# Altium PCB Audiodevice.PcbDoc (part 3 of 3)
Units mm, origin at the board's own origin, x right, y up, seen from the top; angles counter-clockwise.
Board outline 193.67 x 66.67 mm, 2 copper layers (Top Layer, Bottom Layer); 196 components, 164 nets, 795 pads, 323 vias.
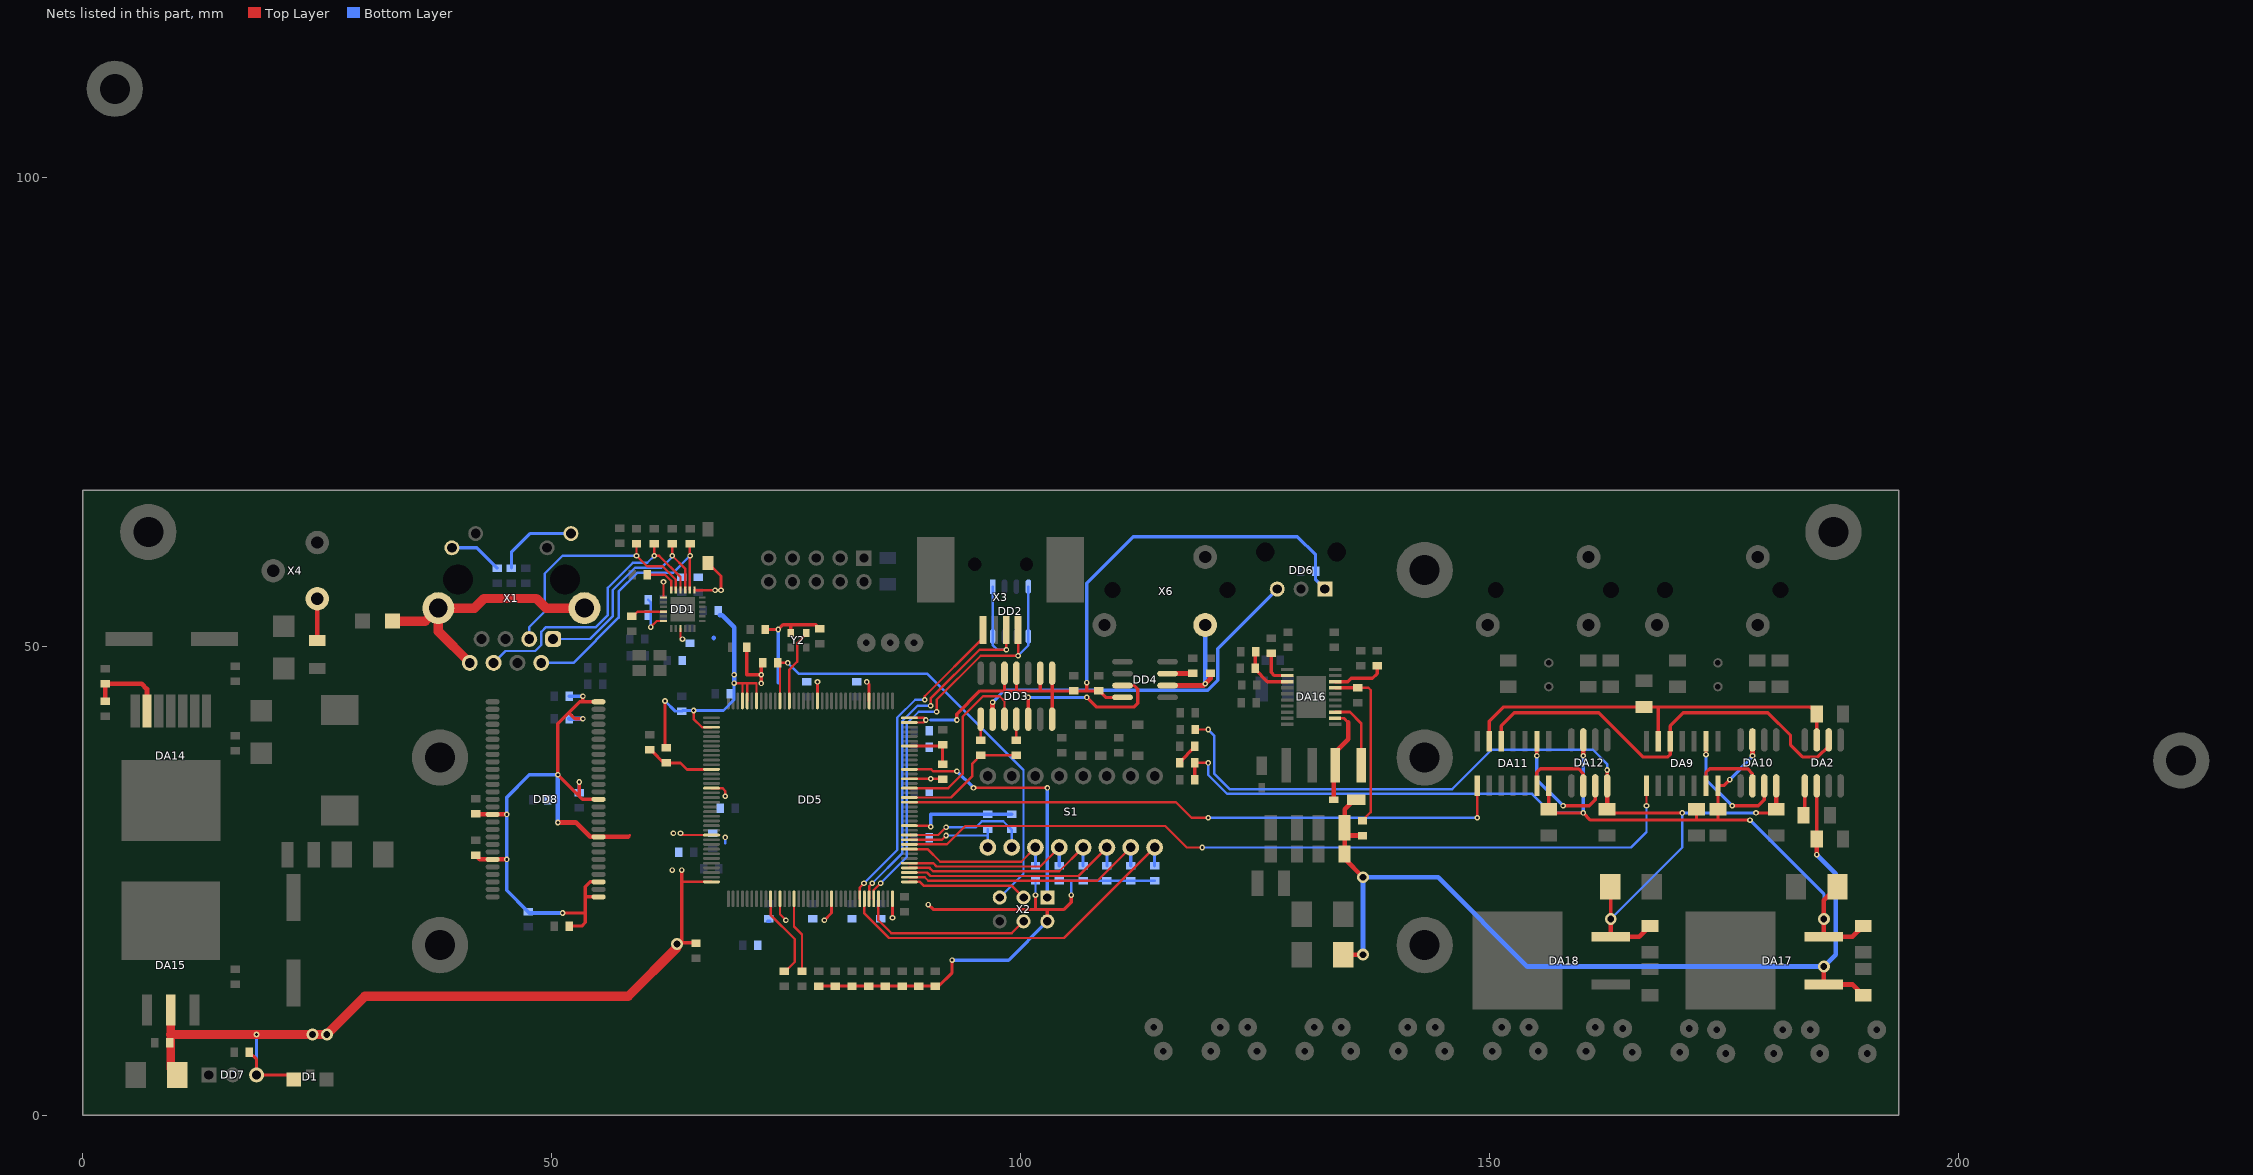
[diagram p3: the nets of this part, all layers, seen from the top]

## Via types
v1: diameter 0.6, hole 0.3, Top Layer to Bottom Layer, 276 vias
v2: diameter 1.27, hole 0.711, Top Layer to Bottom Layer, 47 vias

## Nets (pads, with @x,y where several pads share a name; then routed paths per layer and width w, separated by ;. In a path a pad name is that pad's centre, name@x,y a point inside that pad or via, vN(x,y) a via of type N, cw(c..) or ccw(c..) an arc to the next point about the centre after c; other vN are vias at no path point) (continued)
NetD11_1: D11.1 DA16.2 L3.1 | length 10.5
  Top Layer w0.3: DA16.2@133.548,42.358 134.502,42.358 134.945,41.915
  Top Layer w0.5: D11.1@133.42,33.66 133.42,37.208 L3.1@133.555,37.343 133.555,38.747 134.945,40.137 134.945,41.915
NetDA9_2: DA9.2 DA10.3 | length 13.2
  Top Layer w0.35: v1(173.101,38.481) DA9.2@173.101,39.903 ; v1(175.895,33.02) 178.689,33.02 179.324,33.655 DA10.3@179.324,35.142
  Bottom Layer w0.35: v1(173.101,38.481) 173.101,35.814 v1(175.895,33.02)
NetDA9_13: DA9.13 DA10.2 | length 8
  Top Layer w0.35: DA9.13@173.101,35.179 173.101,36.576 173.482,36.957 177.546,36.957 178.054,36.449 DA10.2@178.054,35.142
NetDA11_2: DA11.2 DA12.3 | length 13.2
  Top Layer w0.35: v1(155.067,38.354) DA11.2@155.067,39.903 ; v1(157.861,33.02) 160.655,33.02 161.29,33.655 DA12.3@161.29,35.142
  Bottom Layer w0.35: v1(155.067,38.354) 155.067,35.814 v1(157.861,33.02)
NetDA11_13: DA11.13 DA12.2 | length 8
  Top Layer w0.35: DA11.13@155.067,35.179 155.067,36.576 155.448,36.957 159.512,36.957 160.02,36.449 DA12.2@160.02,35.142
NetDA14_6: DA14.6 R45.1 R47.2 | length 8.9
  Top Layer w0.5: R45.1@2.413,44.145 R47.2@2.413,46.025 6.299,46.025 6.858,45.466 DA14.6@6.858,43.134
NetDA16_3: DA16.3 L3.2 | length 7.7
  Top Layer w0.3: DA16.3@133.558,43.008 135.122,43.008 136.335,41.795 L3.2@136.335,37.343
NetDA16_7: DA16.7 R50.1 R53.2 | length 18.2
  Top Layer w0.254: R53.2@135.961,45.598 137.104,45.598 137.358,45.344 137.358,32.339 R50.1@136.469,31.45
  Top Layer w0.35: DA16.7@133.558,45.608 R53.2@135.961,45.608
NetDA16_8: DA16.8 R55.1 | length 5.7
  Top Layer w0.35: DA16.8@133.558,46.258 134.904,46.258 135.255,46.609 137.541,46.609 138.049,47.117 R55.1@138.049,47.93
NetDA16_12: DA16.12 R54.2 | length 3.9
  Top Layer w0.35: R54.2@126.746,49.276 126.746,47.244 127.082,46.908 DA16.12@128.458,46.908
NetDA16_13: DA16.13 R49.1 R52.2 | length 5.7
  Top Layer w0.35: R49.1@125.064,49.332 125.039,49.307 R52.2@125.039,47.681 125.039,47.554 126.335,46.258 DA16.13@128.458,46.258
NetDD1_4: DD1.4 R10.2 | length 3.5
  Top Layer w0.254: R10.2@58.674,53.213 59.186,53.725 DD1.4@61.939,53.725
NetDD1_24: DD1.24 R9.2 | length 3.8
  Top Layer w0.254: R9.2@60.198,57.658 62.096,57.658 62.746,57.008 DD1.24@62.746,56.032
NetDD2_1: DD2.1 DD2.8 DD5.103 X3.2@98.501,51.765 | length 45.1
  Top Layer w0.254: DD5.103@83.856,23.101 83.856,24.42 v1(84.201,24.765) ; v1(90.424,43.688) 90.424,44.443 95.638,49.657 v1(98.501,49.657) X3.2@98.501,51.765
  Bottom Layer w0.254: v1(84.201,24.765) 87.376,27.94 87.376,42.037 89.027,43.688 v1(90.424,43.688) ; DD2.1@97.028,56.388 DD2.8@97.028,51.088 97.028,50.165 97.536,49.657 v1(98.501,49.657)
NetDD2_4: DD2.4 DD2.5 DD5.104 X3.3@99.746,51.765 | length 46.3
  Top Layer w0.254: DD5.104@84.356,23.101 84.356,24.031 v1(85.09,24.765) ; v1(91.059,43.053) 91.059,44.323 95.758,49.022 v1(99.746,49.022) X3.3@99.746,51.765
  Bottom Layer w0.254: v1(85.09,24.765) 87.884,27.559 87.884,41.783 89.154,43.053 v1(91.059,43.053) ; v1(99.746,49.022) 100.838,50.114 DD2.5@100.838,51.088 DD2.4@100.838,56.388
NetDD3_8: DD3.8 R19.2 | length 2.2
  Top Layer w0.254: R19.2@95.758,40.005 DD3.8@95.758,42.254
NetDD3_9: DD3.9 DD6.3 | length 39.1
  Top Layer w0.5: DD3.9@97.028,42 DD3.9@97.028,42.254 v1@97.028,43.815
  Bottom Layer w0.35: v1(97.028,44.069) 98.298,45.339 119.961,45.339 121.031,46.409 121.031,49.784 DD6.3@127.381,56.134
NetDD3_11: DD3.11 R16.2 | length 2.2
  Top Layer w0.254: R16.2@99.568,40.005 DD3.11@99.568,42.254
NetDD3_12: DD3.12 DD4.7 | length 17.9
  Top Layer w0.35: DD3.12@100.838,42.254 v1(100.838,44.577) ; v1(107.061,44.577) 108.077,43.561 112.141,43.561 112.522,43.942 112.522,45.466 112.141,45.847 DD4.7@110.884,45.847
  Bottom Layer w0.35: v1(100.838,44.577) v1(107.061,44.577)
NetDD4_2: DD4.2 R15.2 X6.1 | length 11.7
  Top Layer w0.5: DD4.2@115.684,45.847 119.514,45.847 v1(119.701,46.034) 120.269,46.602 R15.2@120.269,47.168
  Bottom Layer w0.5: v1(119.701,46.034) X6.1@119.701,52.297
NetDD4_3: DD4.3 R18.2 | length 2.7
  Top Layer w0.5: DD4.3@115.684,47.117 118.313,47.117 R18.2@118.364,47.168
NetDD5_23: DD5.23 Y2.3 | length 7.9
  Top Layer w0.254: DD5.23@75.356,44.201 75.356,47.545 76.2,48.389 76.2,50.369 Y2.3@77.152,51.321
NetDD5_48: DD5.48 R21.1 R22.2 | length 7.4
  Top Layer w0.3: R22.2@60.579,38.989 R21.1@62.166,37.401 ; R21.1@62.23,37.592 63.754,37.592 64.445,36.901 DD5.48@67.056,36.901
NetDD5_101: DD5.101 X3.1@96.012,51.765 | length 34.5
  Top Layer w0.254: DD5.101@82.856,23.101 82.856,24.309 v1(83.312,24.765) ; v1(89.789,44.323) 89.789,44.704 96.012,50.927 X3.1@96.012,51.562
  Bottom Layer w0.254: v1(83.312,24.765) 86.868,28.321 86.868,42.418 88.773,44.323 v1(89.789,44.323)
NetDD5_138: DD5.138 R31.1 R32.1 | length 5.6
  Top Layer w0.3: DD5.138@88.156,39.401 R31.1@91.694,39.401 ; R32.1@91.694,37.465 R31.1@91.694,39.401 ; R31.1@91.694,39.548 R31.1@91.694,39.401
NetF1_1: F1.1 X4.1 | length 4.4
  Top Layer w0.5: F1.1@25.019,50.649 X4.1@25.019,55.087
NetR11_2: R11.2 X1.9 | length 8.9
  Bottom Layer w0.35: R11.2@45.72,58.369 45.72,60.071 47.699,62.05 X1.9@52.07,62.05
NetR12_2: R12.2 X1.12 | length 5.7
  Bottom Layer w0.35: X1.12@39.37,60.53 42.035,60.53 R12.2@44.196,58.369
NetR56_1: R56.1 R57.2 | length 2.4
  Top Layer w0.35: R56.1@116.993,37.592 R57.2@118.593,39.37
nLED_GREEN: DD5.87 R14.2 | length 7.7
  Top Layer w0.254: DD5.87@75.856,23.101 75.856,20.156 76.708,19.304 R14.2@76.708,15.748
nLED_RED: DD5.82 R13.2 | length 9.3
  Top Layer w0.254: DD5.82@73.356,23.101 73.356,21.386 75.946,18.796 75.946,16.383 R13.2@74.867,15.303
NR: C53.1 DA2.1 | length 3.2
  Top Layer w0.35: C53.1@183.512,32.004 183.642,32.134 DA2.1@183.642,35.142
OPT_nEN: DD3.10 DD5.129 | length 20.3
  Top Layer w0.254: DD5.129@88.156,34.901 92.303,34.901 93.853,36.451 93.853,42.545 96.012,44.704 97.79,44.704 98.298,44.196 DD3.10@98.298,42.254 DD3.10@98.298,41.873
OUTF: C55.1 C61.1 DA2.7 DA9.6 DA11.6 | length 44.4
  Top Layer w0.35: DA11.6@149.987,39.903 149.987,42.037 151.511,43.561 168.021,43.561 ; DA9.6@168.021,39.903 168.021,43.561 ; DA2.7@184.912,40.042 184.912,42.799 184.15,43.561 168.021,43.561
OUTS: DA2.6 DA9.5 DA11.5 | length 46.5
  Top Layer w0.35: DA11.5@151.257,39.903 151.257,41.529 152.654,42.926 161.671,42.926 166.37,38.227 169.037,38.227 169.291,38.481 DA9.5@169.291,39.903 169.291,41.529 170.688,42.926 179.705,42.926 182.118,40.513 182.118,39.497 183.388,38.227 185.039,38.227 186.182,39.37 DA2.6@186.182,40.042
RST: DD5.25 R17.1 X2.5 | length 49.4
  Top Layer w0.254: DD5.25@74.356,44.201 74.356,48.26 v1(75.184,48.26)
  Bottom Layer w0.254: v1(75.184,48.26) 76.327,47.117 90.043,47.117 100.33,36.83 100.33,25.781 X2.5@97.79,23.241
RXN: DD1.22 R7.1 X1.6 | length 30.8
  Top Layer w0.254: R7.1@60.96,60.96 v1(60.96,59.69) 61.468,59.69 63.746,57.412 DD1.22@63.746,56.032
  Bottom Layer w0.254: X1.6@43.815,48.26 45.085,49.53 48.26,49.53 48.895,50.165 48.895,51.562 49.403,52.07 54.73,52.07 56.007,53.347 56.007,56.261 58.674,58.928 60.198,58.928 v1(60.96,59.69)
RXP: DD1.23 R8.1 X1.3 | length 25.9
  Top Layer w0.254: R8.1@59.055,60.96 v1(59.055,59.69) 60.198,58.547 61.849,58.547 63.246,57.15 DD1.23@63.246,56.032
  Bottom Layer w0.254: X1.3@47.625,50.8 47.625,52.07 49.276,53.721 49.276,57.785 51.181,59.69 v1(59.055,59.69)
SCLK1: DA11.8 DD5.126 | length 64.7
  Top Layer w0.254: DD5.126@88.156,33.401 116.586,33.401 118.237,31.75 v1(120.015,31.75) ; v1(148.717,31.75) DA11.8@148.717,35.179
  Bottom Layer w0.254: v1(120.015,31.75) v1(148.717,31.75)
SCLK2: DA9.8 DD5.117 | length 86
  Top Layer w0.254: DD5.117@88.156,28.901 92.147,28.901 94.107,30.861 115.443,30.861 117.729,28.575 v1(119.38,28.575) ; v1(166.751,33.02) DA9.8@166.751,35.179
  Bottom Layer w0.254: v1(119.38,28.575) 165.1,28.575 166.751,30.226 v1(166.751,33.02)
SHD: C10.2 X1.8 X1.13 X1.14 | length 29.1
  Top Layer w1: C10.2@33.045,52.705 36.535,52.705 X1.14@37.93,54.1 ; X1.8@41.275,48.26 37.93,51.605 X1.14@37.93,54.1 ; X1.13@53.51,54.1 49.405,54.1 48.387,55.118 42.799,55.118 41.781,54.1 X1.14@37.93,54.1
SPDIF: DD5.127 R16.1 R19.1 | length 14.1
  Top Layer w0.254: DD5.127@88.156,33.901 92.587,33.901 94.869,36.183 94.869,37.516 R19.1@95.758,38.405 R16.1@99.568,38.405
SW_1: DD5.118 R23.1 S1.1 | length 10.5
  Top Layer w0.254: DD5.118@88.156,29.401 91.631,29.401 v1(92.075,29.845)
  Bottom Layer w0.254: v1(92.075,29.845) 96.52,29.845 ; S1.1@96.52,28.575 96.52,29.845 ; R23.1@96.52,30.531 96.52,29.845
SW_2: DD5.119 R24.1 S1.2 | length 13.8
  Top Layer w0.254: DD5.119@88.156,29.901 91.242,29.901 v1(92.075,30.734)
  Bottom Layer w0.254: v1(92.075,30.734) 95.25,30.734 95.885,31.369 98.171,31.369 99.06,30.48 S1.2@99.06,28.575
SW_3: DD5.116 R25.1 S1.3 | length 16.6
  Top Layer w0.254: DD5.116@88.156,28.401 90.09,28.401 91.44,27.051 100.076,27.051 S1.3@101.6,28.575
  Bottom Layer w0.35: R25.1@101.6,26.619 S1.3@101.6,28.575
SW_4: DD5.113 R26.1 S1.4 | length 18.9
  Top Layer w0.254: DD5.113@88.156,26.901 90.701,26.901 91.059,26.543 102.108,26.543 S1.4@104.14,28.575
  Bottom Layer w0.35: R26.1@104.14,26.619 S1.4@104.14,28.575
SW_5: DD5.112 R27.1 S1.5 | length 21.7
  Top Layer w0.254: DD5.112@88.156,26.401 90.312,26.401 90.678,26.035 104.14,26.035 S1.5@106.68,28.575
  Bottom Layer w0.35: R27.1@106.68,26.619 S1.5@106.68,28.575
SW_6: DD5.111 R28.1 S1.6 | length 24.4
  Top Layer w0.254: DD5.111@88.156,25.901 90.05,25.901 90.424,25.527 106.172,25.527 S1.6@109.22,28.575
  Bottom Layer w0.35: R28.1@109.22,26.619 S1.6@109.22,28.575
SW_7: DD5.110 R29.1 S1.7 | length 27.2
  Top Layer w0.254: DD5.110@88.156,25.401 89.788,25.401 90.17,25.019 108.204,25.019 S1.7@111.76,28.575
  Bottom Layer w0.35: R29.1@111.76,26.619 S1.7@111.76,28.575
SW_8: DD5.102 R30.1 S1.8 | length 39.5
  Top Layer w0.254: DD5.102@83.356,23.101 83.356,21.546 85.979,18.923 104.648,18.923 S1.8@114.3,28.575
  Bottom Layer w0.35: R30.1@114.3,26.619 S1.8@114.3,28.575
SWCLK: DD5.109 X2.3@100.33,23.241 | length 12.9
  Top Layer w0.254: DD5.109@88.156,24.901 89.272,24.901 89.662,24.511 99.06,24.511 X2.3@100.33,23.241
SWDIO: DD5.105 X2.4 | length 18.9
  Top Layer w0.254: DD5.105@84.856,23.101 84.856,20.808 86.233,19.431 99.06,19.431 X2.4@100.33,20.701
TRACESWO: DD5.133 X2.1@102.87,23.241 | length 27.2
  Top Layer w0.254: DD5.133@88.156,36.901 90.48,36.901 90.678,36.703 v1(93.218,36.703) ; v1(94.996,34.925) v1(102.87,34.925)
  Bottom Layer w0.35: v1(93.218,36.703) v1(94.996,34.925) ; X2.1@102.87,23.241 v1(102.87,34.925)
TXN: DD1.20 R5.1 X1.2 | length 27.2
  Top Layer w0.254: DD1.20@64.746,56.032 R5.1@64.746,60.96
  Bottom Layer w0.254: X1.2@48.895,48.26 52.324,48.26 57.15,53.086 57.15,55.873 59.135,57.858 62.938,57.858 v1(64.77,59.69)
TXP: DD1.21 R6.1 X1.1 | length 23.6
  Top Layer w0.254: R6.1@62.865,60.96 v1(62.865,59.69) 64.246,58.309 DD1.21@64.246,56.032
  Bottom Layer w0.254: X1.1@50.165,50.8 54.102,50.8 56.515,53.213 56.515,56.007 58.928,58.42 61.722,58.42 62.865,59.563 v1(62.865,59.69)
V+3.3: C3.2 C4.2 C5.2 C6.1 C7.2 C8.2 C16.1 C17.1 C18.1 C21.1 C22.1 C23.1 C26.1 C27.1 C28.1 C29.1 C30.1 C31.1 C32.1 C33.1 C34.1 C35.1 C36.1 C37.1 C38.1 C39.1 C40.1 C41.1 C42.1 C43.1 C44.1 C45.1 C46.1 C47.1 C71.2 D1.1 D6.1 DA15.2 DD1.1 DD1.9 DD1.19 DD3.1 DD3.2 DD3.4 DD3.5 DD3.14 DD4.8 DD5.6 DD5.17 DD5.30 DD5.32 DD5.33 DD5.39 DD5.52 DD5.62 DD5.72 DD5.84 DD5.95 DD5.108 DD5.121 DD5.131 DD5.143 DD5.144 DD6.1 DD7.3 DD8.1 DD8.3 DD8.9 DD8.14 DD8.27 DD8.43 DD8.49 R1.2 R2.2 R17.2 R20.2 R21.2 R23.2 R24.2 R25.2 R26.2 R27.2 R28.2 R29.2 R30.2 R32.2 R33.2 R34.2 R35.2 R36.2 R37.2 R38.2 R39.2 R40.2 X2.2@102.87,20.701 Y2.4 ZL1.1 | length 405.8
  Top Layer w0.254: 58.166,29.718 58.353,29.905 ; DD1.1@61.939,55.225 v1(61.939,56.896) v1@61.939,57.023 ; DD1.9@63.746,51.918 63.746,51.015 v1(63.969,50.792) ; v1(63.754,30.099) 63.952,29.901 DD5.62@67.056,29.901 DD5.62@67.872,29.901 ; 63.881,24.901 DD5.72@67.056,24.901 ; v1(65.151,43.18) 65.151,42.291 66.041,41.401 DD5.39@67.056,41.401 ; DD1.19@65.266,56.007 v1(67.441,56.007) ; DD5.52@67.056,34.901 68.223,34.901 68.524,34.6 v1@68.524,34.163 ; v1(69.469,46.101) 70.358,46.101 ; DD5.33@70.356,44.201 70.356,46.099 70.358,46.101 ; DD5.32@70.856,44.201 70.856,46.101 ; DD5.30@71.856,44.201 71.856,46.075 71.83,46.101 70.856,46.101 ; DD5.84@74.356,23.101 74.356,21.455 v1(74.991,20.82) ; DD5.121@88.156,30.901 90.31,30.901 v1(90.437,30.774) ; DD5.143@88.156,41.901 89.653,41.901 v1(89.916,42.164) 89.679,42.401 DD5.144@88.156,42.401 ; 70.358,46.101 70.856,46.101
  Top Layer w0.3: v1(62.103,44.196) 62.103,39.319 R21.2@62.23,39.192 ; ZL1.1@66.675,58.906 68.072,57.509 v1(68.072,56.007) ; DD5.17@78.356,44.201 v1(78.356,46.228) ; v1(79.094,20.82) 79.856,21.582 DD5.95@79.856,23.101 ; v1(83.602,46.228) 83.856,45.974 DD5.6@83.856,44.201 ; v1(86.356,21.074) DD5.108@86.356,23.101 ; DD5.131@88.156,35.901 v1(90.437,35.901) 91.658,35.901 R32.2@91.694,35.865
  Top Layer w0.35: C16.1@17.78,6.731 18.542,5.969 DD7.3@18.542,4.318 21.999,4.318 D1.1@22.507,3.81 ; v1(51.181,21.59) 53.594,21.59 ; C26.1@51.892,20.193 53.213,20.193 53.594,20.574 53.594,21.59 ; v1(52.959,35.56) 52.959,34.036 ; v1(53.34,42.291) 52.488,42.291 51.834,42.944 ; v1(53.34,44.704) 53.34,44.106 ; DD8.1@55.016,23.306 53.594,23.306 ; DD8.3@55.016,24.906 54.116,24.906 53.594,24.384 53.594,23.306 ; DD8.14@55.016,33.706 53.289,33.706 52.959,34.036 ; DD8.27@55.016,44.106 53.34,44.106 ; 58.154,29.706 58.166,29.718 ; v1@63.881,26.035 63.881,24.901 63.881,18.415 R20.2@65.583,18.415 ; R1.2@70.815,49.911 70.815,46.99 v1(72.364,46.99) ; v1(72.364,46.075) v1(72.364,46.99) ; R17.2@72.517,48.26 72.364,48.107 v1(72.364,46.99) ; R2.2@72.771,51.816 v1(74.168,51.816) 74.676,52.324 75.502,52.324 ; Y2.4@75.502,51.321 Y2.4@75.502,51.448 75.502,52.324 ; R33.2@78.486,13.792 R34.2@80.264,13.792 R35.2@82.042,13.792 R36.2@83.82,13.792 R37.2@85.598,13.792 R38.2@87.376,13.792 R39.2@89.154,13.792 R40.2@90.932,13.792 91.262,13.792 92.71,15.24 v1(92.71,16.561) ; C23.1@78.613,51.892 78.181,52.324 75.502,52.324 ; v1(90.17,22.479) 90.678,21.971 101.6,21.971 ; v1(93.218,42.164) 93.218,42.799 95.682,45.263 98.298,45.263 ; DD3.5@98.298,47.154 98.298,45.263 ; DD3.4@99.568,47.154 99.568,45.263 ; v1(101.6,23.495) 101.6,21.971 ; DD3.2@102.108,47.154 102.108,45.263 ; X2.2@102.362,20.701 X2.2@102.87,20.701 102.87,21.971 ; DD3.14@103.378,42.254 103.378,45.263 ; DD3.1@103.378,47.154 103.378,45.263 ; v1(105.41,23.495) 105.41,22.733 104.648,21.971 102.87,21.971 ; v1(107.061,46.152) 107.061,45.263 ; DD4.8@110.884,44.577 109.076,44.577 108.39,45.263 C17.1@108.331,45.263 107.061,45.263 ; 51.834,42.944 50.673,41.783 v1(50.673,36.322) 52.959,34.036 ; 51.834,42.944 52.996,44.106 53.34,44.106 ; 53.594,21.59 53.594,23.306 ; 98.298,45.263 99.568,45.263 ; 99.568,45.263 102.108,45.263 ; 101.6,21.971 102.87,21.971 ; 102.108,45.263 103.378,45.263 ; 103.378,45.263 C18.1@105.664,45.263 107.061,45.263
  Top Layer w0.5: C30.1@41.91,27.737 42.341,27.306 DD8.49@43.716,27.306 v1(45.212,27.306) ; C31.1@41.91,32.182 41.986,32.106 DD8.43@43.716,32.106 v1(45.212,32.106) ; v1(50.673,31.242) 52.578,31.242 54.114,29.706 DD8.9@55.016,29.706 58.154,29.706
  Top Layer w0.9: DA15.2@9.398,11.222 9.398,8.636 9.398,5.004 D6.1@10.084,4.318
  Top Layer w1: 9.398,8.636 v1(18.542,8.636) v2(24.511,8.636) v2(26.035,8.636) 30.099,12.7 58.166,12.7 63.373,17.907 v2(63.373,18.288)
  Bottom Layer w0.254: 68.524,29.032 v1(68.524,29.647) v1@68.524,29.774 ; v1(101.6,23.495) R25.2@101.6,25.019 ; R26.2@104.14,25.019 105.41,25.019 ; v1(105.41,23.495) 105.41,25.019 ; R30.2@114.3,25.019 R29.2@111.76,25.019 R28.2@109.22,25.019 R27.2@106.68,25.019 105.41,25.019
  Bottom Layer w0.3: v1(62.103,44.196) 63.195,43.104 C47.1@63.881,43.104 63.957,43.18 v1(65.151,43.18) 68.326,43.18 69.469,44.323 v1(69.469,46.101)
  Bottom Layer w0.35: DD7.3@18.542,4.318 v1(18.542,8.636) ; C29.1@51.892,44.704 v1(53.34,44.704) ; C28.1@52.959,34.417 v1(52.959,35.56) ; C38.1@73.025,20.701 C38.1@73.279,20.701 ; 74.168,46.101 v1(74.168,51.816) ; v1(90.437,30.774) 90.437,32.131 R23.2@96.52,32.131 R24.2@99.06,32.131 ; 90.437,42.164 v1(93.218,42.164) ; v1(92.71,16.561) 98.73,16.561 X2.2@102.87,20.701 ; v1(107.061,46.152) 107.061,56.769 112.014,61.722 129.54,61.722 131.47,59.792 C22.1@131.47,58.039 131.47,57.125 DD6.1@132.461,56.134
  Bottom Layer w0.4: v1(50.673,36.322) 47.625,36.322 45.212,33.909 v1(45.212,32.106) v1(45.212,27.306) 45.212,24.003 C32.1@47.498,21.717 47.625,21.59 v1(51.181,21.59)
  Bottom Layer w0.5: v1(50.673,31.242) v1(50.673,36.322) ; C33.1@51.892,42.291 v1(53.34,42.291) ; 67.302,50.919 67.31,50.927 ; 67.945,53.34 68.199,53.34 69.469,52.07 v1(69.469,46.99) v1(69.469,46.101)
  other v1: 62.865,26.162 63.881,26.162 62.992,30.099 68.524,34.036
VAN: C64.1 C65.1 C91.1 D15.2 DA10.4 DA12.4 DA18.3 R60.1 | length 100.8
  Top Layer w0.254: R60.1@118.618,41.148 v1(120.015,41.148)
  Top Layer w0.35: DA12.4@162.56,35.142 v1(162.56,36.83) ; D15.2@162.89,24.384 162.941,24.333 v2(162.941,20.955) ; C64.1@163.071,32.258 v1(170.561,32.258) ; v1(178.435,32.258) 180.21,32.258 C65.1@180.594,32.642
  Top Layer w0.5: C64.1@162.56,32.642 DA12.4@162.56,35.142 ; v2(162.941,20.955) DA18.3@162.941,19.05 165.986,19.05 C91.1@167.132,20.196 ; C65.1@180.594,32.642 DA10.4@180.594,35.142
  Bottom Layer w0.254: v1(120.015,41.148) 120.65,40.513 120.65,36.449 122.301,34.798 146.05,34.798 150.241,38.989 161.036,38.989 162.56,37.465 v1(162.56,36.83) ; v2(162.941,20.955) 170.561,28.575 v1(170.561,32.258)
  Bottom Layer w0.35: v1(170.561,32.258) v1(178.435,32.258)
VAP: C62.1 C66.1 C67.1 C88.1 D13.1 DA9.14 DA10.7 DA11.14 DA12.7 DA17.3 R56.2 R59.2 | length 114.3
  Top Layer w0.254: R56.2@118.593,37.592 R56.2@118.72,37.465 ; R56.2@118.72,37.592 v1(120.015,37.592)
  Top Layer w0.35: R59.2@118.593,35.814 R56.2@118.593,37.592 ; DA11.14@156.337,35.179 156.337,32.893 156.972,32.258 v1(160.02,32.258) 160.782,31.496 172.085,31.496 ; C67.1@172.085,32.642 172.085,31.496 ; v1(175.641,35.814) 175.006,35.179 DA9.14@174.371,35.179 C66.1@174.371,32.642 174.371,31.496 ; v1(177.8,31.496) 174.371,31.496 ; 172.085,31.496 174.371,31.496
  Top Layer w0.5: v1(160.02,38.354) DA12.7@160.02,40.042 ; v1(178.054,38.354) DA10.7@178.054,40.042 ; D13.1@187.119,24.384 185.674,22.939 v2(185.674,20.955) DA17.3@185.674,19.05 188.719,19.05 C88.1@189.865,20.196
  Bottom Layer w0.254: v1(120.015,37.592) 120.015,36.322 122.047,34.29 154.559,34.29 156.591,32.258 v1(160.02,32.258)
  Bottom Layer w0.35: v1(160.02,32.258) v1(160.02,38.354) ; v1(175.641,35.814) 178.054,38.227 v1(178.054,38.354) ; v1(177.8,31.496) 185.674,23.622 v2(185.674,20.955)
VDDcr: C1.2 C2.2 DD1.6 | length 4.7
  Top Layer w0.254: v1(60.567,52.07) 61.222,52.725 DD1.6@61.939,52.725
  Bottom Layer w0.254: C1.2@60.313,54.991 60.567,54.737 v1(60.567,52.07)
VREFIN: C54.1 C79.1 C80.2 C87.1 D11.2 D12.1 DA2.2 DA17.1 R50.2 | length 102.3
  Top Layer w0.35: C54.1@184.909,29.464 184.912,29.467 DA2.2@184.912,35.142
  Top Layer w0.5: D12.1@134.417,17.145 v2(136.525,17.145) ; D11.2@135.795,33.66 135.58,33.66 134.567,32.647 C80.2@134.567,30.663 C80.2@134.567,29.85 ; R50.2@136.469,29.85 C80.2@134.567,29.85 ; v2(136.525,25.4) 134.567,27.358 C79.1@134.567,27.869 C80.2@134.567,29.85 ; C54.1@184.909,29.464 184.909,27.816 v1(184.912,27.813) ; v2(185.674,15.875) DA17.1@185.674,13.97 188.719,13.97 C87.1@189.865,12.824
  Bottom Layer w0.5: v2(136.525,17.145) v2(136.525,25.4) 144.526,25.4 154.051,15.875 v2(185.674,15.875) 186.944,17.145 186.944,25.781 v1(184.912,27.813)
pads on no net: b1.3 b1.4 b2.3 b2.4 b3.3 b3.4 b4.3 b4.4 b5.3 b5.4 b6.3 b6.4 b7.3 b7.4 b8.3 b8.4 DA2.5 DA2.8 DA9.9 DA10.1 DA10.5 DA10.8 DA11.9 DA12.1 DA12.5 DA12.8 DA14.5 DA14.7 DA16.5 DA16.10 DD3.3 DD3.6 DD4.6 DD5.2 DD5.9 DD5.18 DD5.19 DD5.24 DD5.28 DD5.29 DD5.34 DD5.40 DD5.41 DD5.42 DD5.46 DD5.47 DD5.69 DD5.80 DD5.134 DD5.137 DD5.139 DD6.Mount DD8.36 DD8.40 X1.7 X1.MH3 X1.MH4 X2. X3. X3.7 X3.8 X6. Y1.2 Y1.4 Y2.1

## Polygon pours and split planes (outlines as drawn)
GND on Top Layer "PGND" (solid, pour order 4): 27.94,66.04 27.94,52.07 10.795,52.07 9.906,51.181 9.906,46.99 1.27,46.99 1.27,66.04
GND on Top Layer "PS_GND" (solid, pour order 30): 129.484,36.835 129.484,35.184 128.214,33.914 128.214,14.605 138.43,14.605 146.685,14.605 189.484,14.605 189.484,33.02 185.674,33.02 185.674,30.988 146.685,30.988 146.685,41.91 138.43,41.91 138.43,26.035 136.906,24.511 135.763,24.511 132.969,27.305 132.969,34.671 132.588,35.052 132.588,36.835
GND on Top Layer "GND" (solid, pour order 26): 76.835,64.77 138.43,64.77 138.43,52.705 125.095,52.705 121.92,49.53 121.92,46.99 104.775,46.99 104.775,51.562 100.457,51.562 100.457,53.721 95.377,53.721 95.377,51.435 89.154,45.212 89.154,42.926 86.741,42.926 86.741,46.99 86.741,55.372 83.947,58.166 76.835,58.166
GND on Top Layer "DGND" (solid, pour order 14): 69.723,41.402 68.834,42.358 68.834,42.799 68.453,43.18 68.453,43.815 67.564,44.704 67.564,47.498 66.421,47.498 66.421,44.323 67.691,43.053 67.818,42.926 68.961,41.783 68.961,40.894 69.723,40.894
GND on Top Layer "GND" (solid, remove dead copper, pour order 10): 50.292,45.212 50.292,35.941 53.721,32.512 55.245,32.512 55.245,31.877 50.673,31.877 50.314,31.518 50.299,30.981 50.927,30.353 50.927,25.654 52.07,24.511 52.07,22.098 51.181,22.098 51.181,19.304 47.371,19.304 47.371,22.225 47.371,35.433 47.879,35.941 47.879,45.212
GND on Top Layer "DGND" (solid, pour order 12): 71.755,24.511 73.787,24.511 76.962,27.686 78.74,27.686 79.356,27.07 79.356,24.511 82.296,24.511 83.058,25.273 83.058,26.416 81.28,28.194 81.28,28.702 81.534,28.956 86.106,28.956 86.106,35.56 84.328,35.56 77.216,42.672 71.755,42.672
GND on Top Layer "PGND" (solid, pour order 8): 20.066,16.256 23.495,19.685 23.495,35.941 31.115,35.941 31.115,39.37 3.556,39.37 3.556,2.54 8.255,2.54 8.255,16.256
+IntV on Top Layer "IntV" (solid, pour order 6): 10.795,10.16 10.795,13.335 19.558,13.335 24.13,17.907 24.13,34.925 30.099,34.925 30.099,17.399 22.86,10.16
V+3.3 on Bottom Layer "V+3.3" (solid, pour order 20): 64.389,25.908 64.389,28.067 64.389,28.321 68.072,28.321 68.834,29.083 68.834,34.544 65.786,34.544 61.976,30.734 61.976,25.908
GND on Bottom Layer "DGND" (solid, pour order 16): 63.246,43.815 61.849,45.212 60.325,45.212 60.071,45.466 56.642,45.466 56.134,44.958 54.61,44.958 54.61,48.768 56.388,48.768 57.531,47.625 68.326,47.63 68.326,43.815
V+3.3 on Bottom Layer "V+3.3" (solid, pour order 36): 50.927,30.734 49.911,30.734 48.768,31.877 48.768,37.084 50.927,37.084
GND on Bottom Layer "agnd" (solid, pour order 38): 147.447,39.37 147.447,62.23 186.817,62.23 186.817,39.37
GND on Bottom Layer "MCU_GND" (solid, pour order 34): 3.556,12.192 3.556,29.972 16.518,29.972 24.9,21.59 26.67,21.59 26.67,45.72 41.283,45.72 41.276,22.857 46.99,17.145 66.802,17.145 67.945,18.288 67.945,19.304 71.882,23.241 75.311,23.241 79.375,27.305 82.677,27.305 82.931,27.559 82.931,28.194 82.169,28.956 69.088,28.956 69.088,35.052 75.565,35.052 76.2,35.687 84.836,35.687 85.09,35.941 85.09,37.211 79.883,42.418 71.501,42.418 71.501,45.466 86.36,45.466 86.36,28.575 82.804,25.019 82.804,24.511 83.185,24.13 85.344,24.13 88.265,27.051 88.265,41.656 88.392,41.783 89.281,41.783 89.281,23.622 87.503,21.844 72.517,21.844 72.263,21.59 72.263,20.574 71.12,19.431 71.12,15.24 68.072,12.192
V+3.3 on Bottom Layer "V+3.3" (solid, pour order 22): 72.644,20.32 71.374,19.05 71.374,14.859 68.326,11.811 25.527,11.811 23.114,9.398 23.114,8.128 23.495,7.747 27.178,7.747 29.591,10.16 70.993,10.16 73.531,12.698 73.531,19.683 73.914,20.066 89.027,20.066 91.186,22.225 91.186,24.13 89.789,24.13 89.789,23.241 88.011,21.463 72.644,21.463
V+3.3 on Bottom Layer "V+3.3" (solid, pour order 32): 89.027,45.847 91.567,43.307 91.567,42.418 89.535,42.418 89.535,37.084 89.535,22.987 89.154,22.606 89.154,20.574 91.186,22.606 91.186,30.988 92.202,32.004 92.202,40.132 92.71,40.64 92.71,43.815 89.789,46.736 84.709,46.736 84.709,45.847

## Other copper
Top Layer:
  rectangle net GND: 96.012,53.721 100.457,56.261
  rectangle net GND: 96.901,50.419 97.663,53.721
  rectangle net GND: 81.28,25.273 86.487,27.07
  rectangle net GND: 83.185,40.005 84.836,41.402
  rectangle net GND: 83.185,42.164 86.36,42.799
  rectangle net GND: 83.185,41.275 85.725,42.799
  rectangle net GND: 86.741,43.987 89.154,46.228
  region net GND: 78.359,41.402 78.359,42.545 76.581,42.545 76.581,41.402
  region net GND: 67.691,43.307 67.691,47.498 66.167,47.498 66.167,43.307
  region net GND: 68.707,41.656 68.707,42.545 68.199,42.545 68.199,41.656
  region net GND: 69.088,41.402 69.088,42.113 68.199,42.113 68.199,41.402
  region net GND: 79.502,24.638 79.502,28.067 79.248,28.067 79.248,24.638
  region net GND: 69.723,33.147 69.723,35.56 69.088,35.56 69.088,33.147
  region net GND: 69.723,35.306 69.723,41.402 68.199,41.402 68.199,35.306
  region net GND: 69.723,30.226 69.723,33.528 68.199,33.528 68.199,30.226
  region net GND: 55.372,31.826 55.372,32.385 51.054,32.385 51.054,31.826
  region net V+3.3: 64.135,29.845 64.135,30.48 58.166,30.48 58.166,29.845
  region net V+3.3: 58.674,29.464 58.674,30.226 57.912,30.226 57.912,29.464
  region net V+3.3: 58.42,29.21 58.42,29.591 56.261,29.591 56.261,29.21
  rectangle net GND: 3.556,16.256 16.891,37.465
  rectangle net NetC73_2: 12.7,41.402 29.845,44.831
  region net +IntV: 127.198,43.871 126.436,43.871 126.436,42.093 127.198,42.093
  region net GND: 132.532,54.229 129.484,54.229 129.484,35.184 132.532,35.184
  rectangle net V+3.3: 69.215,45.847 73.025,47.244
  rectangle net GND: 87.122,22.922 88.585,23.114
  rectangle net GND: 87.122,23.241 87.63,24.13
  rectangle net GND: 59.182,30.734 61.087,32.004
  rectangle net GND: 60.452,30.734 64.008,31.115
  rectangle net GND: 63.754,30.734 64.262,30.988
  rectangle net +IntV: 125.984,41.148 127.254,43.871
  rectangle net NetDA16_3: 135.834,38.105 136.596,42.169
  rectangle net NetD10_2: 127.833,38.486 128.849,41.661
  rectangle net GND: 47.371,19.304 49.53,21.59
  rectangle net GND: 47.371,31.047 49.276,33.528
  rectangle net GND: 47.879,39.751 50.292,45.212
  rectangle net GND: 50.419,31.75 53.467,32.639
  rectangle net GND: 71.755,28.956 83.439,35.814
  rectangle net GND: 168.91,14.605 182.245,22.225
  rectangle net GND: 138.43,26.67 146.812,41.91
  rectangle net V+3.3: 62.484,17.526 64.262,26.543
  rectangle net +IntV: 17.399,10.16 21.336,12.7
  rectangle net +IntV: 24.13,21.082 27.178,24.892
  rectangle net GND: 138.684,14.605 146.939,23.876
  rectangle net GND: 88.773,42.926 89.535,43.688
  rectangle net GND: 89.154,42.926 89.916,43.434
  rectangle net GND: 3.556,36.195 15.24,39.37
  pour cut-out: 160.274,22.86 146.939,22.86 146.939,10.16 160.274,10.16 160.274,16.256
Bottom Layer:
  rectangle net GND: 97.409,52.197 100.457,55.372
  rectangle net GND: 76.2,42.418 78.359,43.307
  rectangle net GND: 82.804,39.497 86.36,43.307
  rectangle net GND: 69.088,28.958 70.739,35.052
  rectangle net GND: 88.297,26.67 89.281,41.312
  rectangle net GND: 72.009,21.844 87.503,23.241
  rectangle net V+3.3: 89.63,21.836 90.416,22.606
  rectangle net V+3.3: 90.416,21.836 90.71,22.606
  rectangle net V+3.3: 89.567,22.352 91.075,42.418
  region net V+3.3: 68.834,33.52 68.834,34.544 67.342,34.544 67.342,33.52
  region net V+3.3: 68.834,32.004 68.834,34.544 68.58,34.544 68.58,32.004
  region net V+3.3: 68.834,28.899 68.834,31.242 68.072,31.242 68.072,28.899
  region net V+3.3: 68.834,28.88 68.834,30.708 67.945,30.708 67.945,28.88
  region net V+3.3: 66.294,28.956 66.294,31.242 63.754,31.242 63.754,28.956
  region net V+3.3: 64.389,25.908 64.389,26.924 61.976,26.924 61.976,25.908
  region net GND: 61.976,45.163 61.976,46.609 60.579,46.609 60.579,45.163
  region net GND: 68.326,45.72 68.326,47.625 65.405,47.625 65.405,45.72
  region net GND: 66.04,45.466 66.04,47.625 61.849,47.625 61.849,45.466
  region net V+3.3: 88.011,20.066 88.011,21.463 72.644,21.463 72.644,20.066
  region net V+3.3: 74.549,45.847 74.549,47.244 71.501,47.244 71.501,45.847
  region net V+3.3: 67.564,48.768 67.564,57.531 66.802,57.531 66.802,48.768
  region net V+3.3: 68.326,52.832 68.326,57.531 67.056,57.531 67.056,52.832
  region net V+3.3: 67.564,48.768 67.564,51.181 64.897,51.181 64.897,48.768
  region net V+3.3: 67.564,56.515 67.564,57.531 61.087,57.531 61.087,56.515
  region net GND: 66.802,44.704 66.802,47.625 65.024,47.625 65.024,44.704
  region net V+3.3: 65.786,48.006 65.786,51.181 63.5,51.181 63.5,48.006
  region net VDDcr: 60.706,51.816 60.706,55.626 59.436,55.626 59.436,51.816
  region net GND: 61.341,45.466 61.341,51.562 59.436,51.562 59.436,45.466
  region net GND: 63.234,45.466 63.234,56.007 61.075,56.007 61.075,45.466
  region net GND: 66.536,51.816 66.536,56.007 61.456,56.007 61.456,51.816
  region net GND: 128.595,47.935 128.595,41.204 148.336,41.204 148.336,47.935
  rectangle net V+3.3: 73.406,45.847 85.217,46.736
  rectangle net +IntV: 123.134,41.534 127.325,47.63
  rectangle net GND: 70.993,29.21 84.709,35.052
  rectangle net V+3.3: 62.357,29.21 64.643,30.734
  rectangle net GND: 34.29,14.859 41.283,45.63
  rectangle net GND: 3.556,24.511 16.51,29.972
  rectangle net V+3.3: 23.495,7.747 26.915,9.516
  rectangle net GND: 164.973,46.736 167.894,48.768
  rectangle net GND: 171.069,41.021 173.228,42.926
  rectangle net GND: 152.4,41.021 155.067,42.926
  rectangle net V+3.3: 49.911,35.306 50.919,37.084
  rectangle net V+3.3: 49.911,30.734 50.927,32.131

## Silkscreen, mask and mechanical layers (free items; w line width, h text height)
Top Overlay:
  circle w0.254: c75.565,48.895 r0.127

## Text inside footprints (layer, text, board x,y; h text height)
X1: Top Overlay "Y" at 44.348,60.196 h0.72 r180; Top Overlay "G" at 47.93,60.171 h0.72 r180
X5: Top Overlay "2" at 85.512,57.646 h1.5 r180; Top Overlay "1" at 85.012,60.186 h1.5 r180; Top Overlay "10" at 71.952,57.646 h1.5 r180; Top Overlay "9" at 71.952,60.186 h1.5 r180